# Altium PCB DIGITAL_METER_.PcbDoc
Units mm, origin at the board's own origin, x right, y up, seen from the top; angles counter-clockwise.
Board outline 93.98 x 100.2 mm, 4 copper layers (Top Layer, Internal Plane 1, Internal Plane 2, Bottom Layer); 15 components, 19 nets, 121 pads, 0 vias.
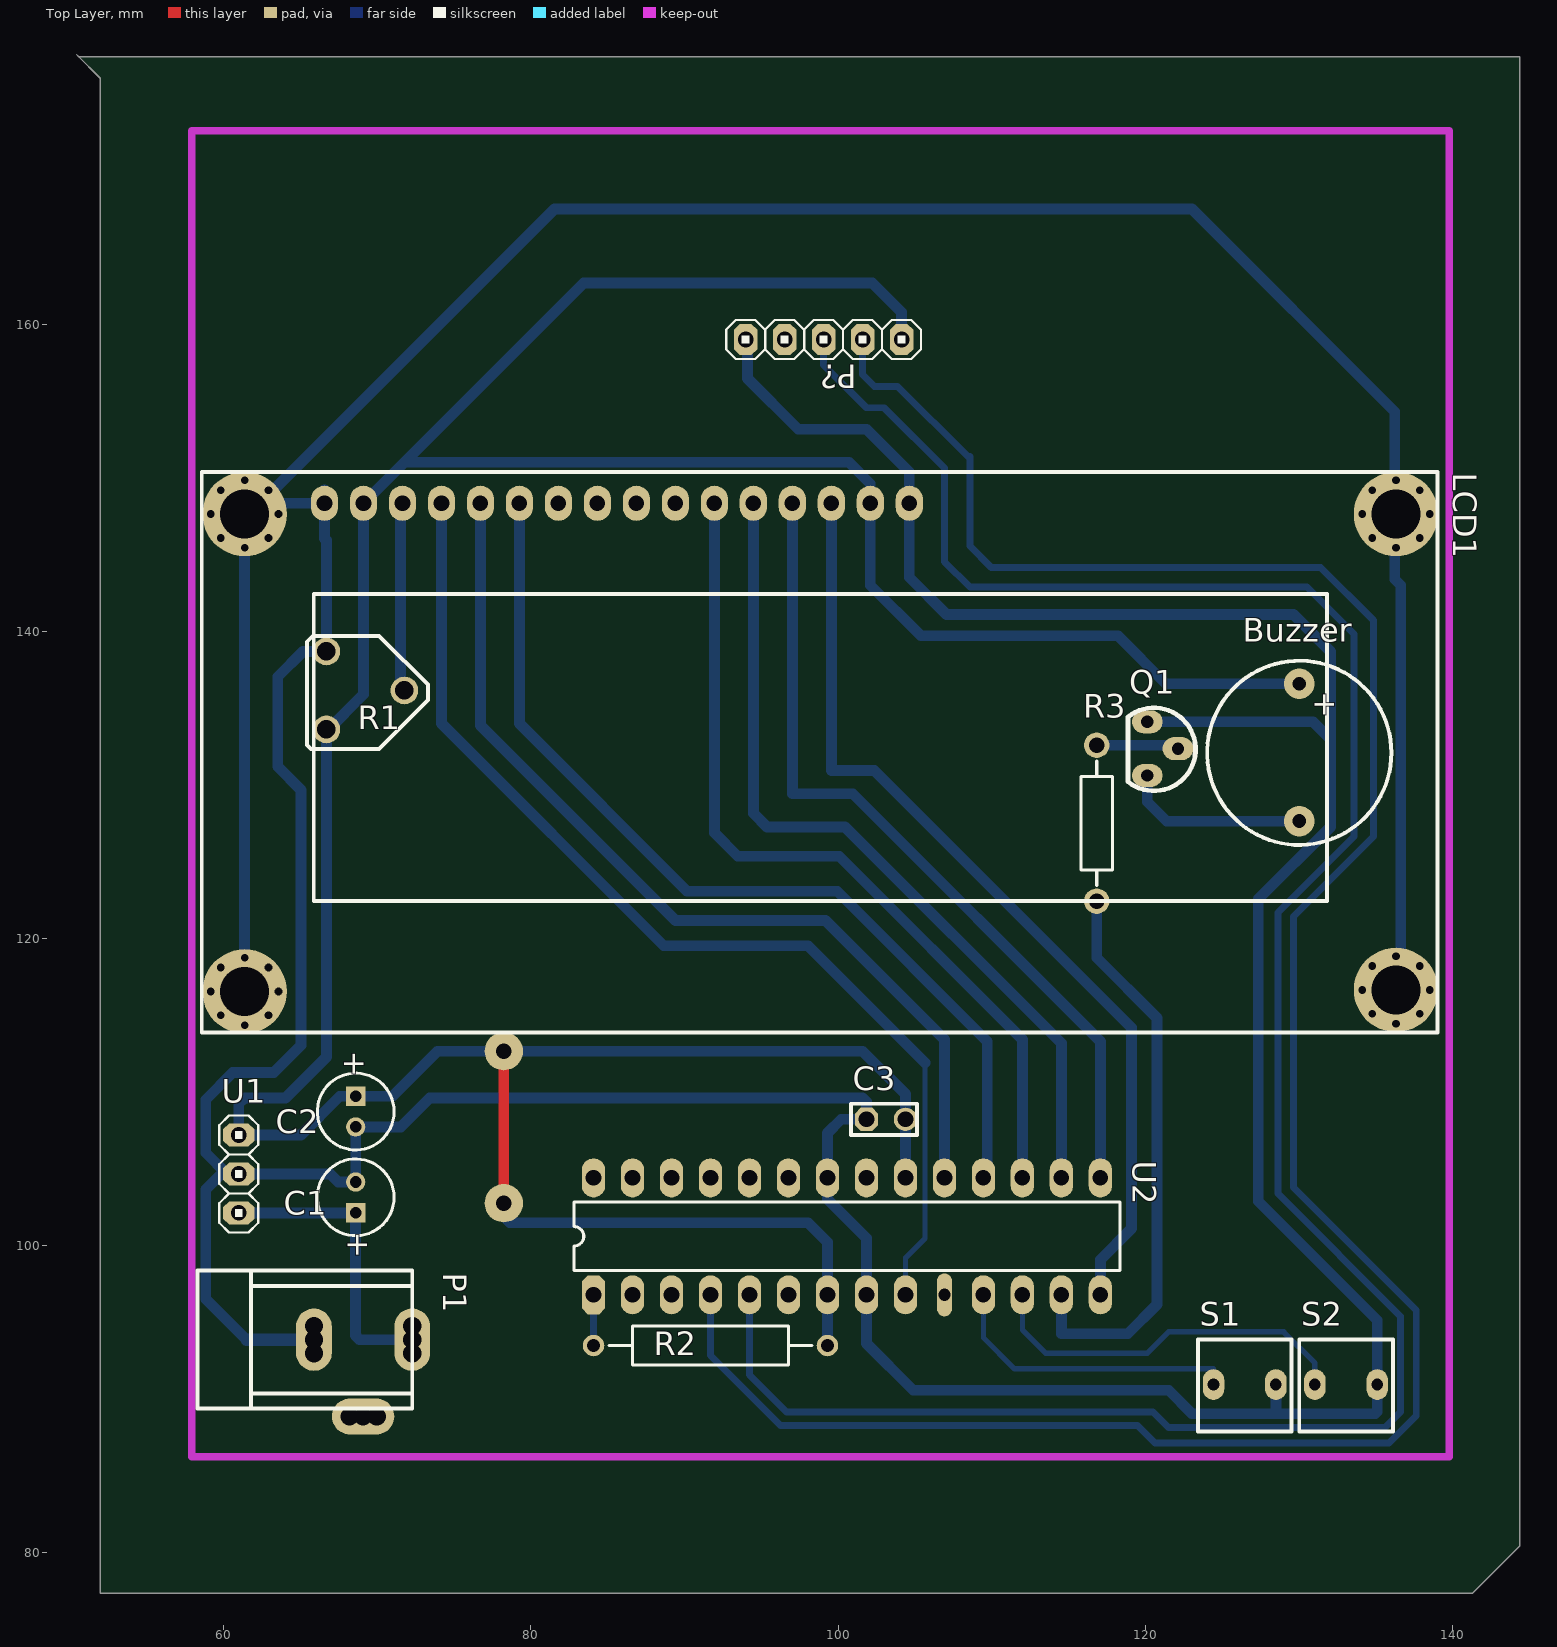
[diagram p0: Top Layer view]
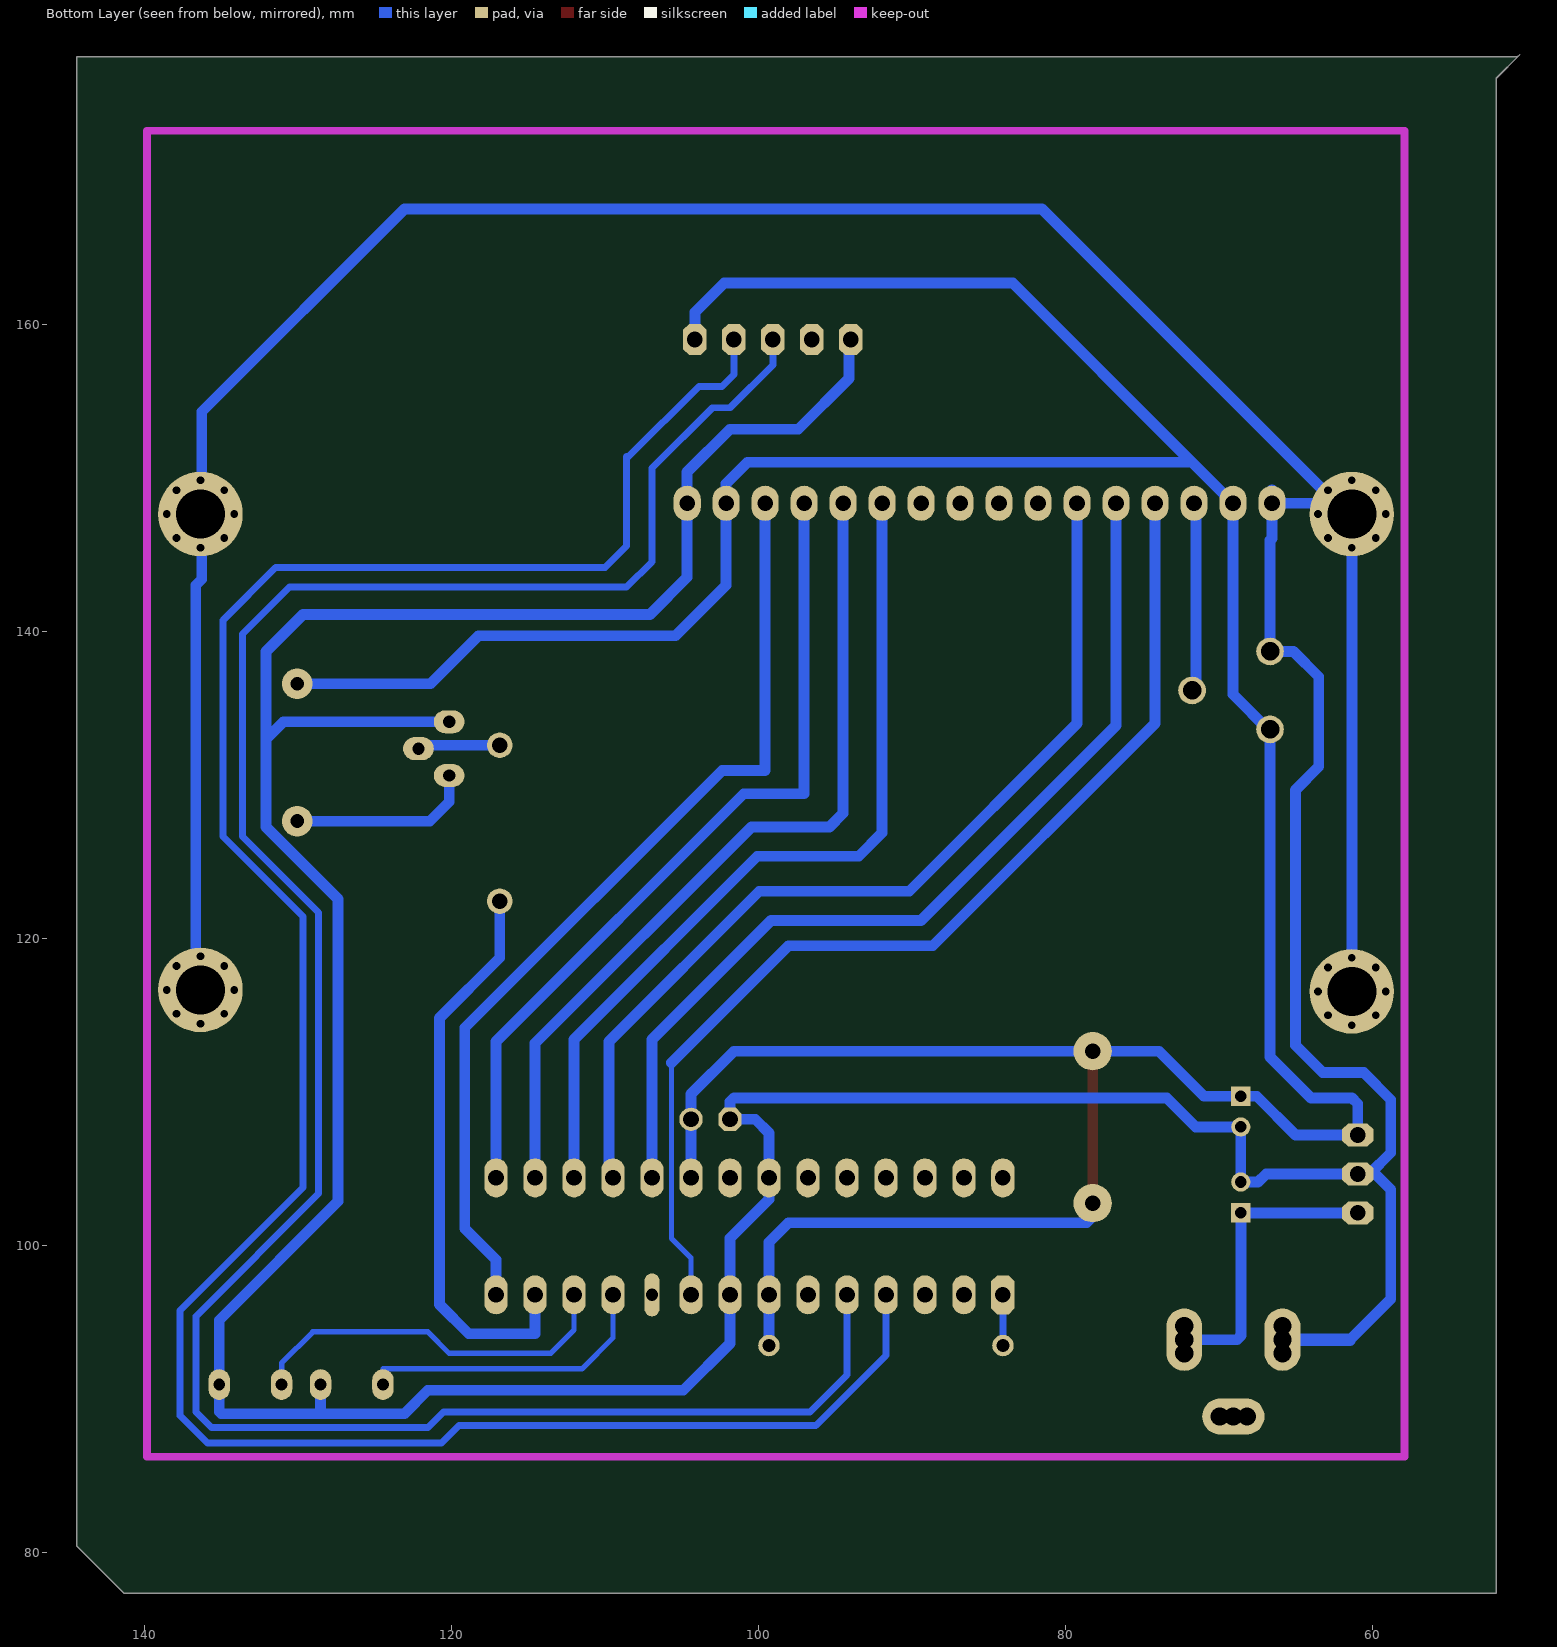
[diagram p1: Bottom Layer view, seen from below]
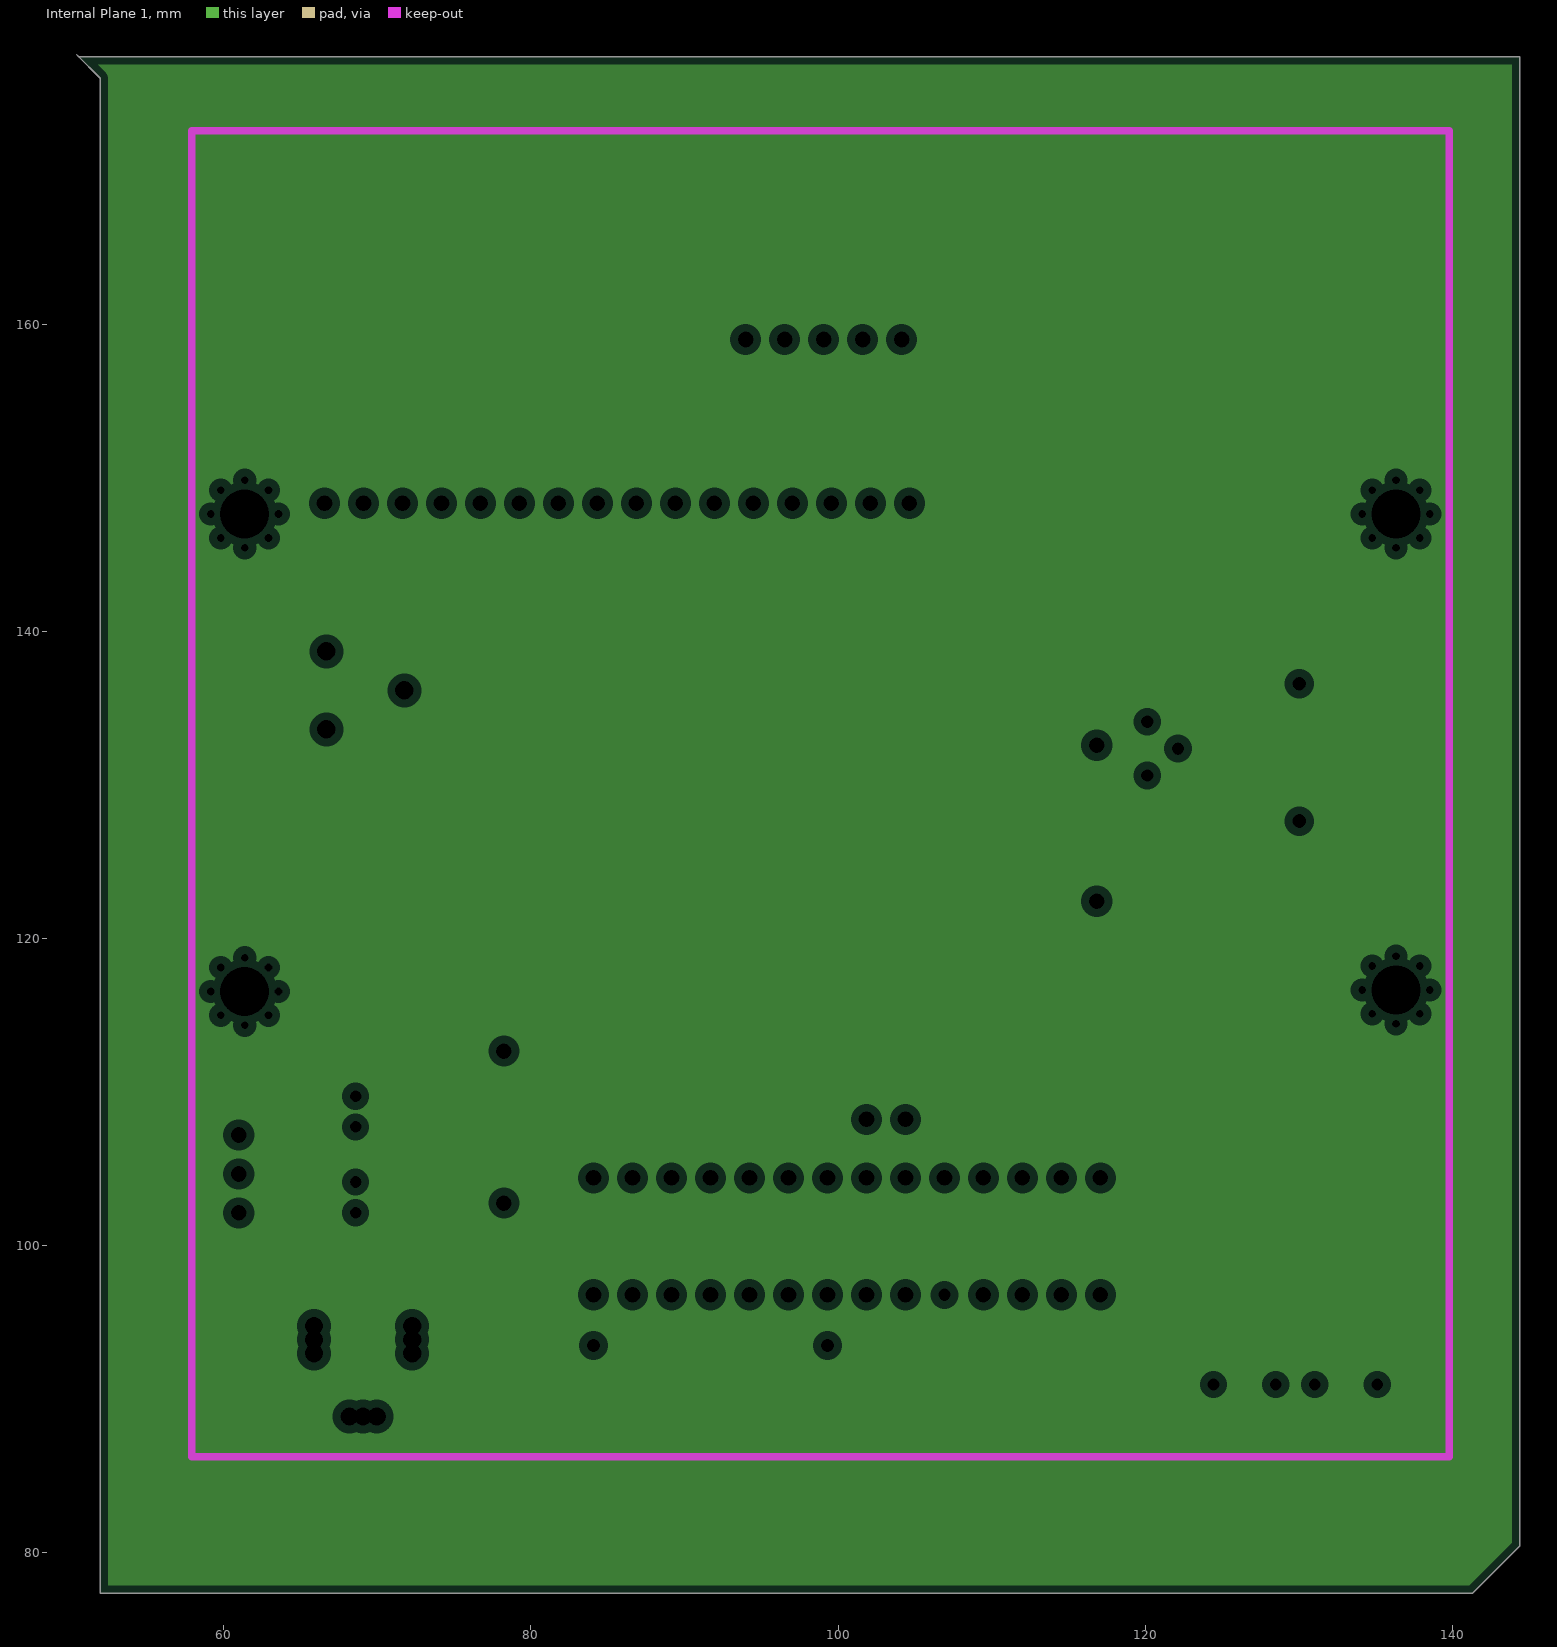
[diagram p2: Internal Plane 1, clearances drawn from the general rule]
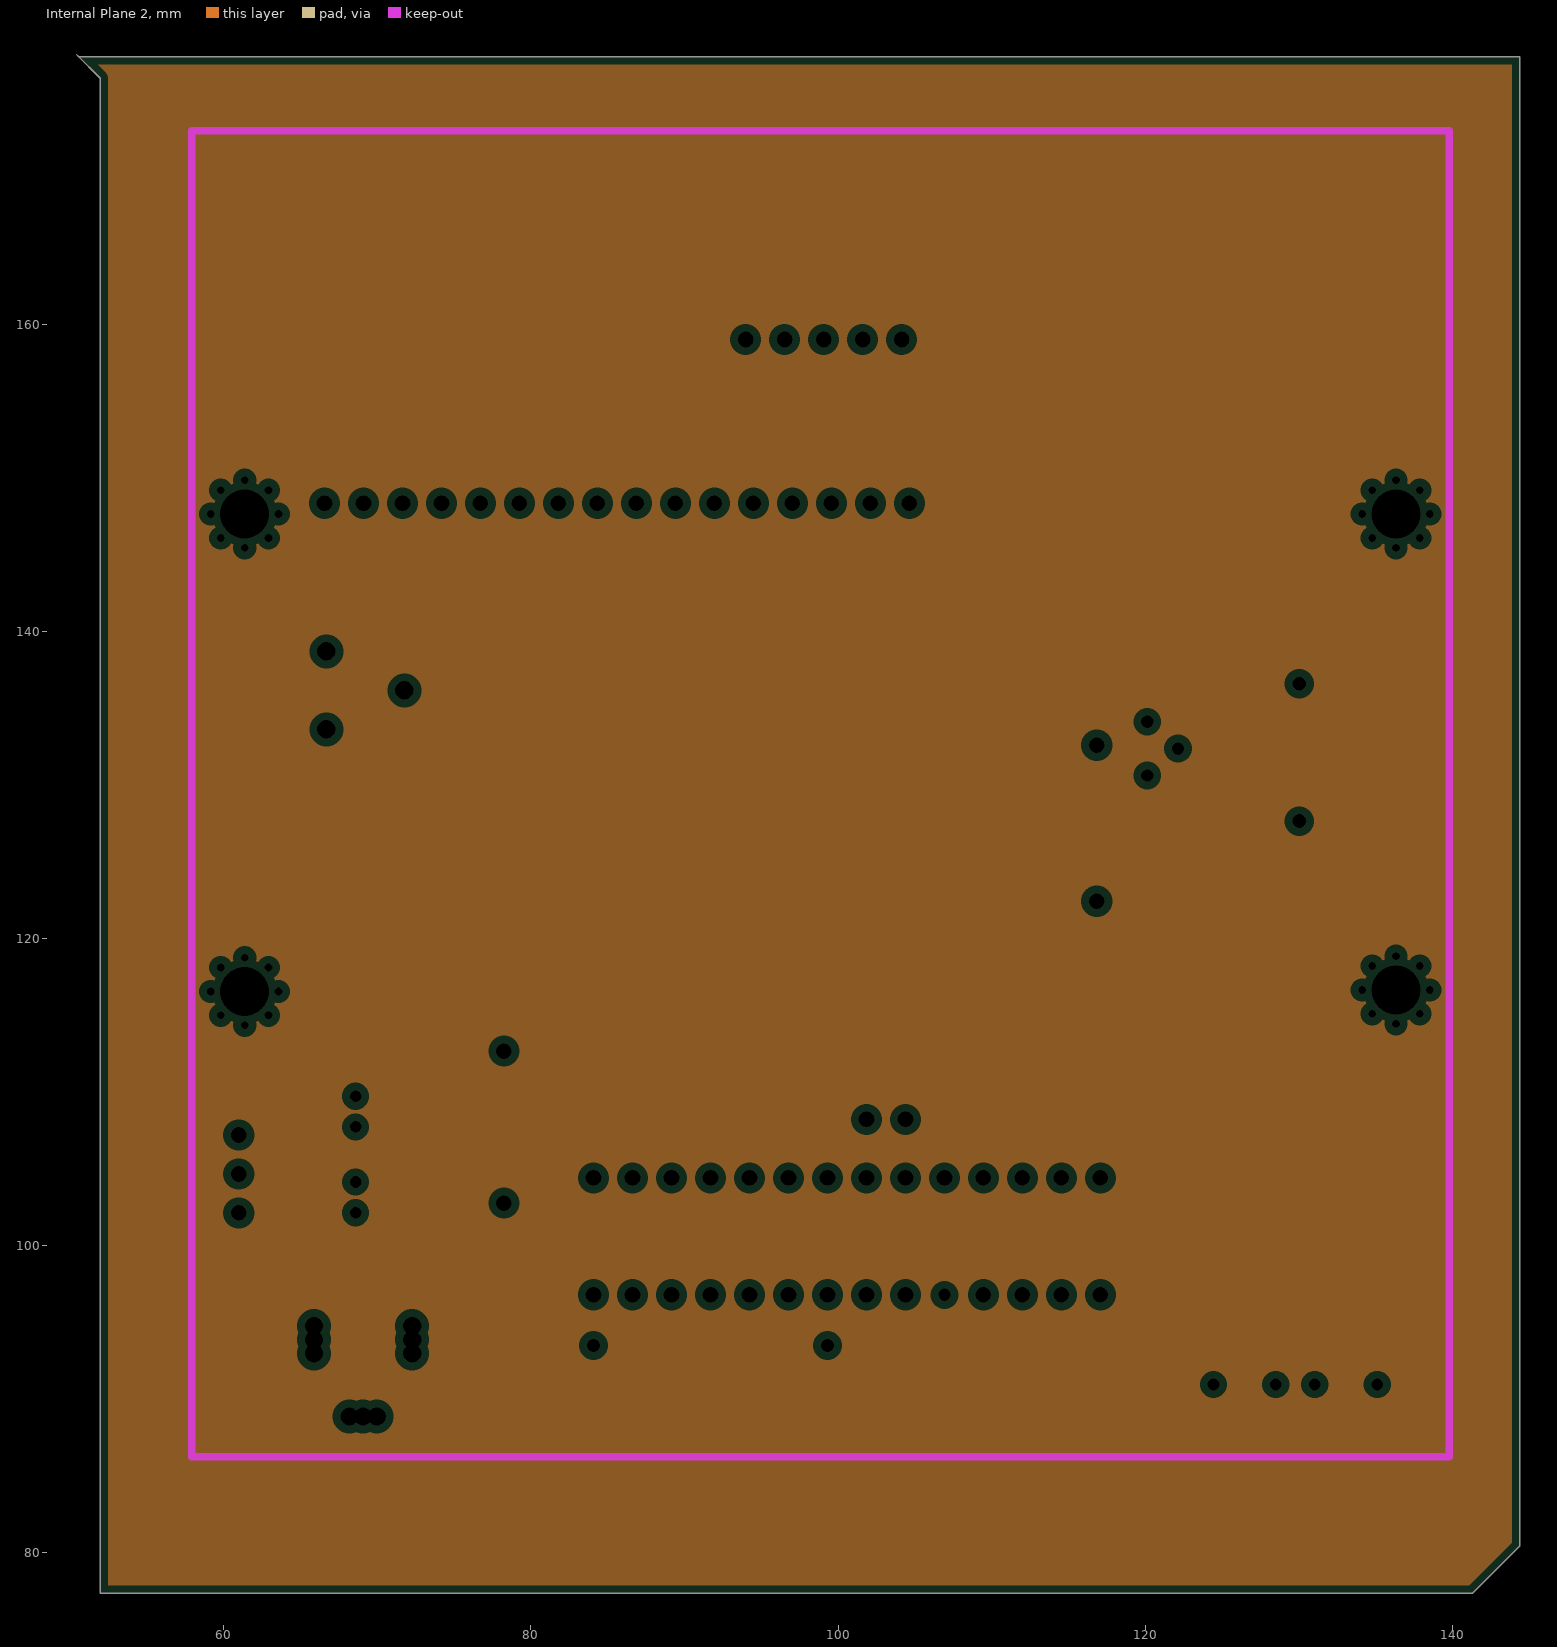
[diagram p3: Internal Plane 2, clearances drawn from the general rule]

## Layer stack, top to bottom
Top Layer: signal copper 0.0356
Dielectric: dielectric 0.32, FR-4, Dk 4.8
Internal Plane 1: plane copper 0.0356
Dielectric: dielectric 0.32, FR-4, Dk 4.8
Internal Plane 2: plane copper 0.0356
Dielectric: dielectric 0.32, FR-4, Dk 4.8
Bottom Layer: signal copper 0.0356

## Board outline
51.943,77.343 141.351,77.343 144.399,80.391 144.399,177.419 50.546,177.419 50.419,177.546 51.943,176.022 51.943,77.597

## Design rules (kind name [scope] priority, off if disabled: settings)
Clearance [All] p1: gap=0.3
ComponentClearance [All] p1: gap=0.254 collisioncheckmode=3 verticalgap=0.254
HoleSize [All] p1: absolutevalues=TRUE maxlimit=6.54 minlimit=0.025 maxpercent=80.000 minpercent=20.000
PlaneClearance [All] p1: clearance=0.508
PlaneConnect [All] p1: planeconnectstyle=Relief reliefexpansion=0.508 reliefentries=4 reliefconductorwidth=0.254 reliefairgap=0.254
PolygonConnect [All] p1: connectstyle=Relief reliefconductorwidth=0.254 reliefentries=4 polygonreliefangle="90 Angle"
RoutingLayers [All] p1: top layer_v5=FALSE bottom layer_v5=TRUE
RoutingVias [All] p1: holewidth=0.6 width=1 viastyle="Through Hole" minholewidth=0.711 minwidth=1.27 maxholewidth=0.711 maxwidth=1.27
SolderMaskExpansion [All] p1: expansion=0.102
TestPointUsage [All] p1: valid=0 allowmultiple=FALSE
Testpoint [All] p1: side=15 testpointundercomponent=TRUE minsize=1.016 maxsize=2.54 preferedsize=1.524 minholesize=0 maxholesize=1.016 preferedholesize=0.813 testpointgrid=0.025 style=1023 order=0123456789
Width VCC [InNet('VCC')] p1: maxlimit=0.8 minlimit=0.45 preferedwidth=0.55
Width GND [InNet('GND')] p2: maxlimit=0.9 minlimit=0.42 preferedwidth=0.55
Width [All] p3: maxlimit=0.75 minlimit=0.35 preferedwidth=0.55
14 further rules are at their usual default settings.

## Components (designator, comment, footprint, x,y, rotation, side; value= is the part's Value field where it differs from the comment)
Buzzer "Buzzer" BUZZER 130.048,132.08 r270 top
C1 "Cap Pol1" B 68.58,103.124 r90 top
C2 "Cap Pol1" B 68.58,108.712 r270 top
C3 "Cap" My_cap100n 103.124,108.204 r0 top
LCD1 "20x4" "LCD 16x2" 66.548,148.336 r0 top
P1 "jack-adaptor" jack 68.834,93.853 r270 top
P? "HY-SRF05" My_1X05 99.06,159.004 r0 top
Q1 "2N2222" T4-TO92 120.396,133.604 r0 top
R1 "RPotSMD" MY_TRIM_POT 69.088,139.192 r0 top
R2 "Res2" AXIAL-0.6 91.694,93.472 r0 top
R3 "1k" My_axial-0.4 116.84,127.508 r90 top
S1 "PB-2pin" PB-2pin 123.444,87.884 r0 top
S2 "PB-2pin" PB-2pin 130.048,87.884 r0 top
U1 "7805" My_1X03 60.96,104.648 r90 top
U2 "ATmega8-16PI" My_28P3 100.584,100.584 r0 top

## Footprints (in the part's own frame and the unit in brackets; to place one, negate y for a bottom-side part, rotate by r counter-clockwise, add the part's x,y. Pads: shape width x height; smd on the part's side, far side on the other; paste and mask are expansions set on the pad)
AXIAL-0.6 [mm] "Variable Resistor; 2 Leads"
  round 1.4 hole 0.85: 1(-7.62,0) 2(7.62,0)
  silkscreen extent -6.6,-1.27 6.6,1.27
B [mm] "Capacitor, Electrolytic, Radial; Body 5 x 6.8 mm (Dia.xH typ); Pin Spacing 2 mm (typ)"
  rect 1.25x1.25 hole 0.75: 1(-1,0)
  round 1.25 hole 0.75: 2(1,0)
  silkscreen extent -2.5,-2.5 2.5,2.5
BUZZER [mm] "BUZZER"
  round 2 hole 0.9: 1(-4.5,0) 2(4.45,0)
  silkscreen extent -6,-6 6,6
jack [mil] "jack"
  round 47 hole 47: 1(-35,135) 1(35,135) 3(-35,-117) 3(35,-117)
  oval 160x92 hole 47: 1(0,135) 3(0,-117)
  round 47.01 hole 47.01: 2(197.01,-25.98) 2(197.01,44.02)
  oval 92.01x160 hole 47.01: 2(197.01,9.02)
  silkscreen extent -177,-416 177,135
"LCD 16x2" [mm] "Character LCD, 2 Row, 16 Colunm"
  oval 1.778x2.286 hole 1.016: 1(0,0) 2(2.54,0) 3(5.08,0) 4(7.62,0) 5(10.16,0) 6(12.7,0) 7(15.24,0) 8(17.78,0) 9(20.32,0) 10(22.86,0) 11(25.4,0) 12(27.94,0) 13(30.48,0) 14(33.02,0) 15(35.56,0) 16(38.1,0)
  round 0.6 hole 0.5: MH(-7.4,-31.8) MH(-7.4,-0.7) MH(-6.756,-33.356) MH(-6.756,-30.244) MH(-6.756,-2.256) MH(-6.756,0.856) MH(-5.2,-34) MH(-5.2,-29.6) MH(-5.2,-2.9) MH(-5.2,1.5) MH(-3.644,-33.356) MH(-3.644,-30.244) MH(-3.644,-2.256) MH(-3.644,0.856) MH(-3,-31.8) MH(-3,-0.7) MH(67.6,-31.7) MH(67.6,-0.7) MH(68.244,-33.256) MH(68.244,-30.144) MH(68.244,-2.256) MH(68.244,0.856) MH(69.8,-33.9) MH(69.8,-29.5) MH(69.8,-2.9) MH(69.8,1.5) MH(71.356,-33.256) MH(71.356,-30.144) MH(71.356,-2.256) MH(71.356,0.856) MH(72,-31.7) MH(72,-0.7)
  round 5.5 hole 3.2: MH(-5.2,-31.8) MH(-5.2,-0.7) MH(69.8,-31.7) MH(69.8,-0.7)
  silkscreen extent -7.99,-34.47 72.51,2.03, body extent -7.99,-34.47 72.51,2.03, height 25.52
My_1X03 [mil]
  oct 60x80 hole 40: 1(-100,0) 2(0,0) 3(100,0)
  silkscreen extent -150,-50 150,50
My_1X05 [mil]
  oct 60x80 hole 40: 1(-200,0) 2(-100,0) 3(0,0) 4(100,0) 5(200,0)
  silkscreen extent -250,-50 250,50
My_28P3 [mil]
  oct 60x100 hole 40: 1(-650,-150)
  oval 60x100 hole 40: 2(-550,-150) 3(-450,-150) 4(-350,-150) 5(-250,-150) 6(-150,-150) 7(-50,-150) 8(50,-150) 9(150,-150) 11(350,-150) 12(450,-150) 13(550,-150) 14(650,-150) 15(650,150) 16(550,150) 17(450,150) 18(350,150) 19(250,150) 20(150,150) 21(50,150) 22(-50,150) 23(-150,150) 24(-250,150) 25(-350,150) 26(-450,150) 27(-550,150) 28(-650,150)
  oval 39.37x110.24 hole 31.5: 10(250,-150)
  silkscreen extent -700,-88 700,88
My_axial-0.4 [mil]
  round 65 hole 40: 1(-200.5,-0.5) 2(199.5,-0.5)
  silkscreen extent -160,-41 160,40
My_cap100n [mil]
  oct 60x60 hole 40: 1(-50,0)
  round 60 hole 40: 2(50,0)
  silkscreen extent -90,-40 80,40
MY_TRIM_POT [mm]
  round 1.8 hole 1.2: 1(-2.413,-0.508) 2(-2.413,-5.588) 3(2.667,-3.048)
  silkscreen extent -3.68,-6.86 4.19,0.51
PB-2pin [mil] "Switch"
  oval 55.12x78.74 hole 30: 1(40,120) 2(200,120)
  silkscreen extent 0,0 240,235
T4-TO92 [mm]
  oval 2x1.5 hole 0.8: B(1.75,-1.25) C(-0.25,-3) E(-0.25,0.5)
  silkscreen extent -1.52,-4 2.89,1.41

## Part data
C1 C2: "Polarized Capacitor (Radial)"
C3: library part "Cap ceramic", "CAP-100Nf"
LCD1: library part LCD
P1: library part "Header 3", "Header, 3-Pin"
P?: library part "Header 5", "Header, 5-Pin"
Q1: "NPN"
R1: "Potentiometer"
R2: "Resistor"
R3: library part Res, "resistor 1/4 wat"
S1 S2: "Switch"
U1: "Regulator"
U2: "AVR 8K Bytes of In-System Programmable Flash Memory"

## Free pads (board coordinates)
  round 2.5 hole 1: 0(78.232,112.649) 1(78.232,102.743)

## Nets (pads, with @x,y where several pads share a name; then routed paths per layer and width w, separated by ;. In a path a pad name is that pad's centre, name@x,y a point inside that pad or via, vN(x,y) a via of type N, cw(c..) or ccw(c..) an arc to the next point about the centre after c; other vN are vias at no path point)
/RESET: R2.1 U2.1 | length 3.3
  Bottom Layer w0.45: R2.1 U2.1
BUZZER: R3.1 U2.13 | length 37.5
  Bottom Layer w0.7: U2.13 114.554,94.234 118.872,94.234 120.777,96.139 120.777,114.808 116.853,118.732 R3.1
EN: LCD1.6 U2.18 | length 62.5
  Bottom Layer w0.7: LCD1.6 79.248,133.985 90.17,123.063 99.949,123.063 109.728,113.284 U2.18@109.728,104.14
GND: C1.2 C2.2 C3.1 LCD1.1 LCD1.16 LCD1.MH P1.3 P?.1 Q1.E R1.1 S1.2 S2.2 U1.2 U2.8 U2.22 | length 444.7
  Bottom Layer w0.7: U1.2@60.198,104.648 58.812,106.034 58.812,109.485 60.579,111.252 63.246,111.252 65.024,113.03 65.024,129.667 63.5,131.191 63.5,137.033 65.151,138.684 R1.1 66.675,145.923 66.548,146.05 LCD1.1@66.548,149.225 ; LCD1.MH@61.341,116.84 61.341,147.32 LCD1.MH@61.658,147.637 ; 61.468,93.853 58.812,96.509 58.812,103.643 59.817,104.648 66.929,104.648 67.453,104.124 C1.2 C2.2 71.517,107.712 73.406,109.601 101.6,109.601 101.854,109.347 C3.1 100.203,108.204 99.314,107.315 99.314,102.997 101.854,100.457 101.854,93.599 104.902,90.551 121.539,90.551 123.063,89.027 135.001,89.027 135.128,89.154 135.128,95.123 127.381,102.87 127.381,122.555 132.08,127.254 132.08,138.684 129.667,141.097 107.061,141.097 104.648,143.51 104.648,150.368 101.854,153.162 97.409,153.162 94.107,156.464 P?.1@94.107,158.877 ; LCD1.MH@61.595,147.701 62.23,148.336 LCD1.1@66.675,148.336 ; LCD1.MH@63.058,149.037 81.534,167.513 123.063,167.513 136.271,154.305 LCD1.MH@136.271,149.836 ; Q1.E 130.945,134.104 132.08,132.969 ; 128.524,89.027 S1.2 ; LCD1.MH@136.156,147.828 136.144,147.828 LCD1.MH@136.348,147.624 ; LCD1.MH@136.271,145.436 136.271,143.383 136.652,143.002 LCD1.MH@136.652,118.836 ; LCD1.MH@136.525,116.713 LCD1.MH@136.652,116.84
  Bottom Layer w0.8: 61.468,93.853 P1.3@65.862,93.853
LCD_DB4: LCD1.11 U2.17 | length 56.1
  Bottom Layer w0.7: LCD1.11 91.948,126.873 93.472,125.349 100.076,125.349 112.014,113.411 U2.17
LCD_DB5: LCD1.12 U2.16 | length 55.2
  Bottom Layer w0.7: LCD1.12 94.488,128.143 95.377,127.254 100.457,127.254 114.554,113.157 U2.16
LCD_DB6: LCD1.13 U2.15 | length 54.6
  Bottom Layer w0.7: LCD1.13 97.028,129.413 100.965,129.413 117.094,113.284 U2.15
LCD_DB7: LCD1.14 U2.14 | length 62.1
  Bottom Layer w0.7: LCD1.14 99.568,130.937 102.362,130.937 119.126,114.173 119.126,101.092 117.094,99.06 U2.14
NetBuzzer_2: Buzzer.2 Q1.C | length 12.1
  Bottom Layer w0.7: Q1.C 120.146,128.901 121.417,127.63 Buzzer.2
NetC1_1: C1.1 P1.1 U1.1 | length 19.4
  Bottom Layer w0.7: U1.1 C1.1@68.564,102.108 ; C1.1 C1.1@68.564,102.108 ; P1.1@72.263,93.853 68.834,93.853 68.564,94.123 C1.1@68.564,102.108
NetLCD1_3: LCD1.3 R1.3 | length 12.6
  Bottom Layer w0.7: R1.3@71.501,136.144 R1.3 71.501,136.398 71.501,148.209 LCD1.3
NetQ1_B: Q1.B R3.2 | length 5.4
  Bottom Layer w0.7: R3.2 121.925,132.575 Q1.B
RS: LCD1.4 U2.9 | length 70.6
  Bottom Layer w0.35: U2.9 104.394,99.187 105.664,100.457 105.664,111.887
  Bottom Layer w0.7: LCD1.4 74.168,133.985 88.646,119.507 98.044,119.507 105.664,111.887
RW: LCD1.5 U2.19 | length 62.2
  Bottom Layer w0.7: LCD1.5 76.708,133.858 89.408,121.158 99.187,121.158 106.934,113.411 U2.19
SRF_ECHO: P?.3 U2.5 | length 152.5
  Bottom Layer w0.45: U2.5 94.234,91.567 96.647,89.154 120.523,89.154 121.539,88.138 135.636,88.138 136.652,89.154 136.652,95.377 128.651,103.378 128.651,121.666 133.604,126.619 133.604,139.827 130.556,142.875 108.585,142.875 106.934,144.526 106.934,150.622 102.997,154.559 101.854,154.559 99.06,157.353 P?.3
SRF_TRIG: P?.4 U2.4 | length 155.7
  Bottom Layer w0.45: U2.4 91.694,92.837 96.266,88.265 119.507,88.265 120.65,87.122 135.89,87.122 137.668,88.9 137.668,95.758 129.667,103.759 129.667,121.412 134.874,126.619 134.874,140.716 131.445,144.145 109.982,144.145 108.585,145.542 108.585,151.257 ; P?.4@101.473,158.877 101.6,158.75 101.6,156.718 102.362,155.956 103.886,155.956 108.458,151.384 108.585,151.384
SW1: S1.1 U2.11 | length 19.1
  Bottom Layer w0.35: U2.11 109.474,93.98 111.506,91.948 124.46,91.948 S1.1@124.46,91.44
SW2: S2.1 U2.12 | length 24.8
  Bottom Layer w0.35: U2.12 112.014,94.488 113.538,92.964 120.142,92.964 121.539,94.361 129.032,94.361 131.064,92.329 S2.1
VCC: Buzzer.1 C2.1 C3.2 LCD1.2 LCD1.15 P?.5 pad.0 pad.1 R1.2 R2.2 U1.3 U2.7 U2.20 | length 249.1
  Top Layer w0.7: pad.1 pad.0
  Bottom Layer w0.7: R1.2@66.675,133.477 69.088,135.89 LCD1.2 71.755,151.003 100.584,151.003 ; R1.2 66.675,112.268 64.008,109.601 61.341,109.601 60.96,109.22 U1.3 65.024,107.188 67.548,109.712 70.977,109.712 73.914,112.649 101.6,112.649 104.394,109.855 U2.20 ; 71.882,151.13 83.439,162.687 102.235,162.687 104.14,160.782 P?.5 ; pad.1 78.232,101.854 78.613,101.473 98.044,101.473 99.314,100.203 R2.2 ; 100.711,151.003 102.108,149.606 ; 102.108,149.479 102.108,143.002 105.41,139.7 118.237,139.7 121.357,136.58 Buzzer.1
pads on no net: LCD1.7 LCD1.8 LCD1.9 LCD1.10 P1.2 P?.2 U2.2 U2.3 U2.6 U2.10 U2.21 U2.23 U2.24 U2.25 U2.26 U2.27 U2.28

## Polygon pours and split planes (outlines as drawn)
no net on Internal Plane 1 (split plane): 143.881,80.606 141.136,77.861 52.461,77.861 52.461,176.022 52.422,176.22 52.309,176.388 51.796,176.901 143.881,176.901
no net on Internal Plane 2 (split plane): 143.881,80.606 141.136,77.861 52.461,77.861 52.461,176.022 52.422,176.22 52.309,176.388 51.796,176.901 143.881,176.901

## Keep-outs
Keep-Out Layer:
  lines w0.5: 57.912,86.233 57.912,172.593 58.42,172.593 139.827,172.593 139.827,86.233 58.547,86.233 57.912,86.233

## Text inside footprints (layer, text, board x,y; h text height)
Buzzer: Top Overlay "+" at 131.048,136.08 h1.52 r270
C1: Top Overlay "+" at 69.33,99.149 h1.5 r90
C2: Top Overlay "+" at 67.83,112.687 h1.5 r270